# Altium PCB ife19_TS_AIL.PcbDoc
Units mm, origin at the board's own origin, x right, y up, seen from the top; angles counter-clockwise.
Board outline 28.7 x 14.9 mm, 2 copper layers (Top Layer, Bottom Layer); 7 components, 6 nets, 23 pads, 2 vias.
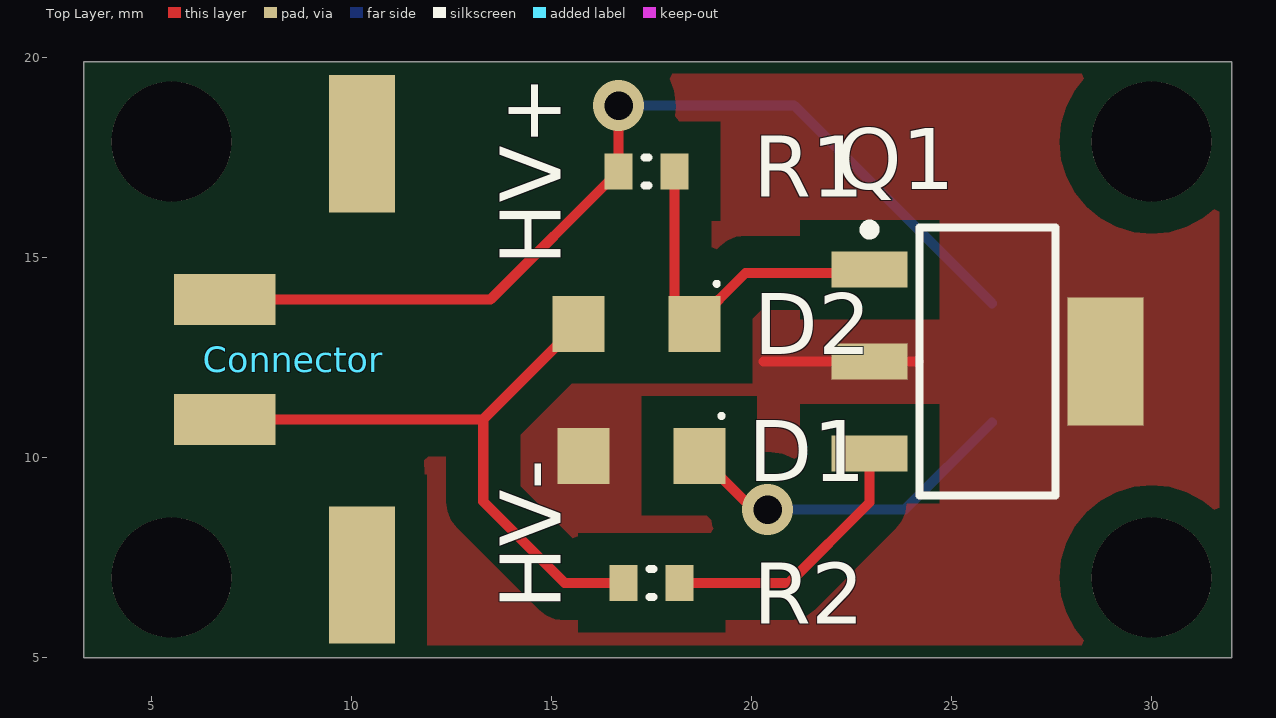
[diagram p0: Top Layer view]
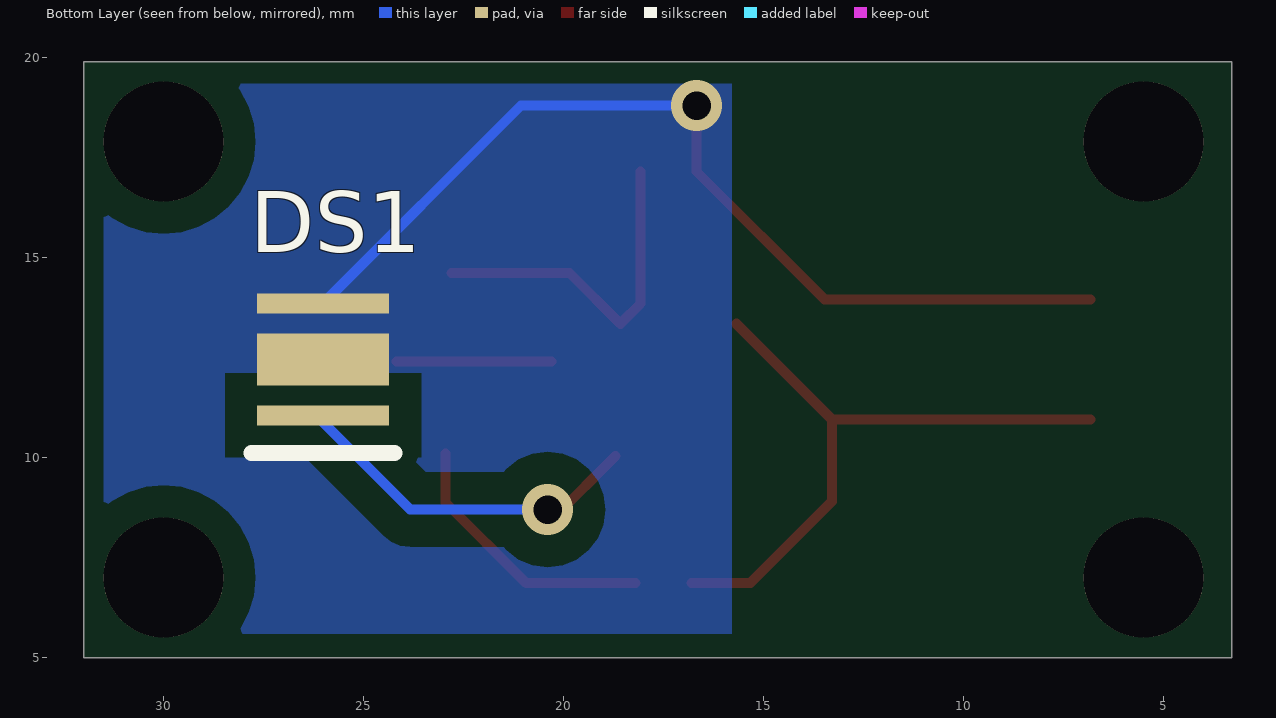
[diagram p1: Bottom Layer view, seen from below]

## Layer stack, top to bottom
Top Solder: solder mask 0.0102, Solder Resist, Dk 3.5
Top Layer: signal copper 0.0356
Dielectric 1: dielectric 0.32, FR-4, Dk 4.8
Bottom Layer: signal copper 0.0356
Bottom Solder: solder mask 0.0102, Solder Resist, Dk 3.5

## Board outline
3.3,5 32,5 32,19.9 3.3,19.9

## Design rules (kind name [scope] priority, off if disabled: settings)
BoardOutlineClearance [All] p1: gap=0.3 ignorepadtopadclearanceinfootprint=FALSE
Clearance [All] p1: gap=0.8 ignorepadtopadclearanceinfootprint=TRUE
ComponentClearance [All] p1: gap=0.254 collisioncheckmode=3 verticalgap=0 showdistances=FALSE
MinimumSolderMaskSliver [All] p1: minsoldermaskwidth=0
PolygonConnect [All] p1: connectstyle=Direct reliefconductorwidth=0.254 reliefentries=4 polygonreliefangle="90 Angle" airgapwidth=0.254
RoomDefinition ife19_TS_AIL [InComponentClass('ife19_TS_AIL')] p1: confinementstyle=ConfineIn formatcopy=TRUE lockcomponents=FALSE outline 3.3,4.961 32.025,4.961 32.025,19.947 3.3,19.947
RoutingVias [All] p1: holewidth=0.711 width=1.27 viastyle="Through Hole" minholewidth=0.711 minwidth=1.27 maxholewidth=0.711 maxwidth=1.27
SilkToSilkClearance [All] p1: silktosilkclearance=0
SilkToSolderMaskClearance [IsPad] p1: minsilkscreentomaskgap=0 clearancetoexposedcopper=TRUE
SolderMaskExpansion [All] p1: expansion=0.102
Width [All] p1: maxlimit=0.254 minlimit=0.254 preferedwidth=0.254
26 further rules are at their usual default settings.

## Components (designator, comment, footprint, x,y, rotation, side; value= is the part's Value field where it differs from the comment)
Connector "" 43650-0224 10.263,12.454 r90 top
D1 "BZD27C56P-HE3-08" VISH-DO-219AB_V 17.248,10.041 r0 top
D2 "BZX84C10L" VISH-DO-219AB_V 17.13,13.343 r0 top
DS1 "XTEAWT-02-0000-00000BFF6" CREE-XT-E_LED-3_A_V 26.011,12.454 r270 bottom
Q1 "PBHV8560ZX" NXP-SOT223_L 25.9,12.4 r0 top
R1 "300K 1% 0603(1608)" RESC0603(1608)_L 17.375,17.153 r180 top value="249000.00 Ohm"
R2 "1.4K 1% 0603(1608)" RESC0603(1608)_L 17.502,6.866 r0 top value="348000.00 Ohm"

## Footprints (in the part's own frame and the unit in brackets; to place one, negate y for a bottom-side part, rotate by r counter-clockwise, add the part's x,y. Pads: shape width x height; smd on the part's side, far side on the other; paste and mask are expansions set on the pad)
43650-0224 [mm]
  rect 1.27x2.54 smd: P$1(1.5,3.43) P$2(-1.5,3.43)
  rect 3.43x1.65 smd: TAB1(5.39,0) TAB2(-5.39,0)
CREE-XT-E_LED-3_A_V [mm] "SMD, 3-Leads, Body 3.58x3.58mm"
  rect 0.5x3.3 smd: 1(-1.4,0) 2(1.4,0)
  rect 1.3x3.3 smd: 3(0,0)
  silkscreen extent 2.34,-1.79 2.34,1.79, body extent -1.79,-1.79 1.79,1.79, height 2.54
NXP-SOT223_L [mm] "SOT223, 4-Leads, Body 6.7x3.7mm, Pitch 2.3mm, IPC High Density"
  rect 1.9x0.9 smd: 1(-2.95,2.3) 2(-2.95,0) 3(-2.95,-2.3)
  rect 1.9x3.2 smd: 4(2.95,0)
  silkscreen extent -3.07,-3.35 1.7,3.42, body extent -1.85,-3.35 1.85,3.35, height 1.8
RESC0603(1608)_L [mm] "Chip Resistor, Body 1.6x0.8mm, IPC High Density"
  rect 0.7x0.9 smd: 1(-0.7,0) 2(0.7,0)
  silkscreen extent -0.05,-0.35 0.05,0.35, body extent -0.85,-0.47 0.85,0.47, height 0.6
VISH-DO-219AB_V [mm] "SODFL, 2-Leads, Body 1.90x2.9mm"
  rect 1.3x1.4 smd: 1(-1.45,0) 2(1.45,0)
  silkscreen extent 1.95,0.95 2.05,1.05, body extent -1.85,-0.95 1.85,0.95, height 1.08

## Part data
Connector: library part HEADER_POS2_?43650-0224, Package=43650-0224, DeviceName=43650-0224, DeviceSetName=HEADER_POS2_?, GateName_1=G$1, LibraryName="MOLEX Micro-Fit", SymbolName_1=HEADER_POS2
D1 D2: library part CMP-1711-00001-1, "Schottky Rectifier, 30 V, 1.1 A, 2-Pin DO-219AB (SMF), RoHS, Tape and Reel", Manufacturer="Vishay Semiconductor", PartNumber=SL03-GS08CT, ComponentLink1Description="Manufacturer URL", ComponentLink1URL=http://www.vishay.com/, ComponentLink2Description=Datasheet, ComponentLink2URL=http://www.vishay.com/docs/85687/sl02.pdf, DatasheetVersion="Rev. 2.0", Mounting Technology="Surface Mount", PackageDescription="2-Pin Small Outline Diode, Flat Lead, Body 1.90 x 2.9 mm", PackageReference=DO-219AB
DS1: library part CMP-2000-05092-1, "XLamp(R) XT-E LED, 350 mA, 2.85 V, 3-Pin SMD, RoHS, Tape and Reel", Color=White,Warm, CRI (Color Rendering Index)=70, Current - Max=1.5A, Current - Test=350mA, Flux @ 25 degC, Current - Test=-, Flux @ 85 degC, Current - Test=126lm(122lm~130lm), Lumens/Watt @ Current - Test=126lm/W, Manufacturer=Cree, Package / Case=2-SMD,NoLead,ExposedPad, Standard Package=250, Thermal Resistance of Package=5degC/W, Voltage - Forward (Vf) (Typ)=2.85V, Associated Product=711-1181-ND-LEDREFLECTOR711-1179-ND-LEDREFLECTORC13253_TINA2-R-CLIP16-ND-REFLECTORROUND1POS16.1MMD1C13353_LEILA-R-CLIP16-ND-REFLECTORROUND1POS21.6MMD1C12516_RITA-WAS-ND-REFLECTORRECTANG1POS31.9+2FP13025_LISA2-W-PIN-ND-ASSEMBLYROUND1POS9.9MMD6.8FP13026_LISA2-WW-PIN-ND-ASSEMBLYROUND1POS9.9MMD6.8FP13028_LISA2-M-PIN-ND-ASSEMBLYROUND1POS9.9MMD6.8FP13029_LISA2-WW-CLIP-ND-ASSEMBLYROUND1POS9.9MMD6.8FP13030_LISA2-M-CLIP-ND-ASSEMBLYROUND1POS9.9MMD6.8FA13093_TINA-M2-ND-ASSEMBLYROUND1POS16.1MMD9.FCA13329_BILLIE-A-ND-ASSEMBLYROUND1POS21.5MMD16FN13888_BILLIE-A-ND-ASSEMBLYROUND1POS21.5MMD16C12480_MIRELLA-50-S-PIN-ND-REFLECTOR1POS49.9MMRND24MMC12481_MIRELLA-50-M-PIN-ND-REFLECTOR1POS49.9MMRND24MMC12482_MIRELLA-50-W-PIN-ND-REFLECTOR1POS49.9MMRND24MMCN12486_MIRELLA-50-S-PIN-DL-ND-REFLECTOR49.9MMRND24MMCN12487_MIRELLA-50-M-PIN-DL-ND, Category=Optoelectronics, CCT (K)=3750K, Datasheet URL=http://www.mouser.com/ds/2/90/XLampXTE-181295.pdf, Datasheet Version="Rev. 13D, 04/2016", Design Resources=LightingProductSelector, Family=LEDLighting-White, Featured Product=XLampHorticultureLighting, Manufacturer URL=http://www.cree.com/, Mounting Type=SurfaceMount, Packaging=Tape&Reel(TR), Series=XLampXT-E, Viewing Angle=115deg
Q1: library part CMP-2000-05940-1, "NPN Medium Power Transistor, 60 V, 1 A, -55 to 150 degC, 4-Pin SOT223, RoHS, Tape and Reel", Current - Collector (Ic) (Max)=1A, Current - Collector Cutoff (Max)=100nA(ICBO), DC Current Gain (hFE) (Min) @ Ic, Vce=100@150mA,2V, Frequency - Transition=180MHz, Manufacturer="NXP Semiconductors", Package / Case=TO-261-4,TO-261AA, Package Description="4-Pin Small Outline Transistor Package, Body 6.5 x 3.5 mm, Pitch 2.3 mm", Package Reference=SOT223, Package Version="06-03-16, 03/2006", Power - Max=1.35W, Standard Package=1, Supplier Device Package=SC-73, Voltage - Collector Emitter Breakdown (Max)=60V, Category=DiscreteSemiconductorProducts, Datasheet URL=http://www.nxp.com/documents/data_sheet/BCP55_BCX55_BC55PA.pdf?fasp=1&WT_TYPE=Data%20Sheets&WT_VENDOR=FREESCALE&WT_FILE_FORMAT=pdf&WT_ASSET=Documentation&fileExt=.pdf, Datasheet Version="Rev. 8, 10/2011", Family=Transistors(BJT)-Single, Featured Product=NXP-I睠Interface, Manufacturer URL=http://www.nxp.com/, Mounting Technology=SurfaceMount, Mounting Type=SurfaceMount, Online Catalog=NPNTransistors, Other Names=568-8013-6, Package URL=http://www.nxp.com/documents/outline_drawing/SOT223.pdf, Packaging=Digi-Reel®, PCN Design/Specification=ResinHardener02/Jul/2013, PCN Packaging=LighterReels02/Jan/2014, Series=-, Transistor Type=NPN, Vce Saturation (Max) @ Ib, Ic=500mV@50mA,500mA
R1: library part CMP-1012-00779-1, "249K 0.1W 1% 0603 (1608 Metric)  SMD", Case-EIA=0603, Case-Metric=1608, Power="0.1 W", Tolerance="1 %", Technology=SMT
R2: library part CMP-1012-00796-1, "348K 0.1W 1% 0603 (1608 Metric)  SMD", Case-EIA=0603, Case-Metric=1608, Power="0.1 W", Tolerance="1 %", Technology=SMT

## Free pads (board coordinates)
  round 3 hole 3 unplated: +(5.5,7) +(5.5,17.9) +(30,7) +(30,17.9)

## Via types
v1: diameter 1.27, hole 0.711, Top Layer to Bottom Layer, 2 vias

## Nets (pads, with @x,y where several pads share a name; then routed paths per layer and width w, separated by ;. In a path a pad name is that pad's centre, name@x,y a point inside that pad or via, vN(x,y) a via of type N, cw(c..) or ccw(c..) an arc to the next point about the centre after c; other vN are vias at no path point)
HV+: Connector.P$1 DS1.1 DS1.3 R1.2 | length 24.2
  Top Layer w0.254: Connector.P$1 13.476,13.954 R1.2 v1(16.675,18.8)
  Bottom Layer w0.254: v1(16.675,18.8) 21.065,18.8 DS1.1
HV-: Connector.P$2 D2.1 R2.1 | length 16.2
  Top Layer w0.254: Connector.P$2 13.291,10.954 ; D2.1 13.291,10.954 ; R2.1 15.325,6.866 13.291,8.9 13.291,10.954
NetD1_1: D1.1 Q1.2 Q1.4 | length 3.9
  Top Layer w0.254: 20.298,12.4 24.175,12.4
NetD1_2: D1.2 DS1.2 | length 9.2
  Top Layer w0.254: D1.2 20.239,8.5 v1@20.7,8.5
  Bottom Layer w0.254: v1(20.4,8.7) 23.834,8.7 DS1.2@26.011,10.877
NetD2_2: D2.2 Q1.1 R1.1 | length 8.8
  Top Layer w0.254: R1.1 18.075,13.848 D2.2 19.85,14.613 Q1.1@22.8,14.613
NetQ1_3: Q1.3 R2.2 | length 6.8
  Top Layer w0.254: R2.2 20.941,6.866 22.95,8.875 Q1.3
pads on no net: Connector.TAB1 Connector.TAB2

## Polygon pours and split planes (outlines as drawn)
HV+ on Bottom Layer "HV+_L02_P001" (solid, pour order 1): 31.5,5.6 31.5,19.347 15.8,19.347 15.8,5.6
NetD1_1 on Top Layer "Bottom Layer-No Net" (solid, remove dead copper, pour order 0): 11.738,19.838 32.094,19.838 32.094,5.106 11.865,5.106

## Silkscreen, mask and mechanical layers (free items; w line width, h text height)
Top Overlay:
  text "HV+" at 15.225,14.8 h1.52 r90
  text "HV-" at 15.225,6.2 h1.52 r90
Mechanical 1:
  the board outline again, w0.254